# EAGLE board RM pulses (EAGLE 7.5.0)
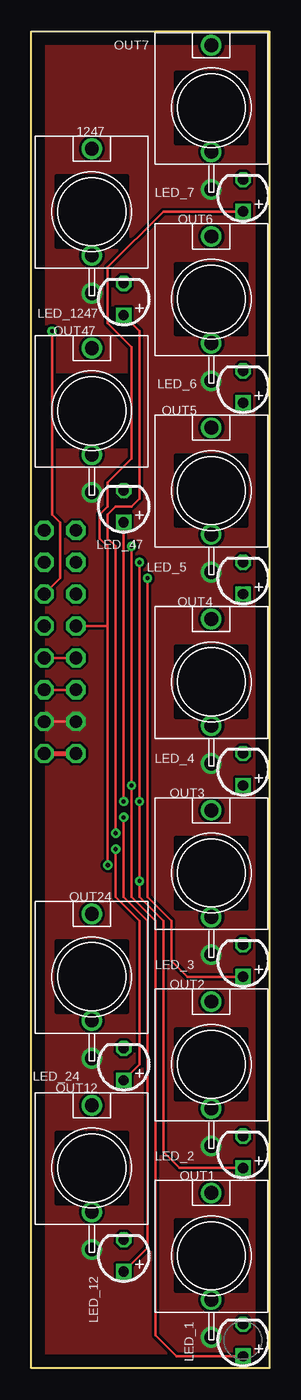
[diagram p0: board, top side]
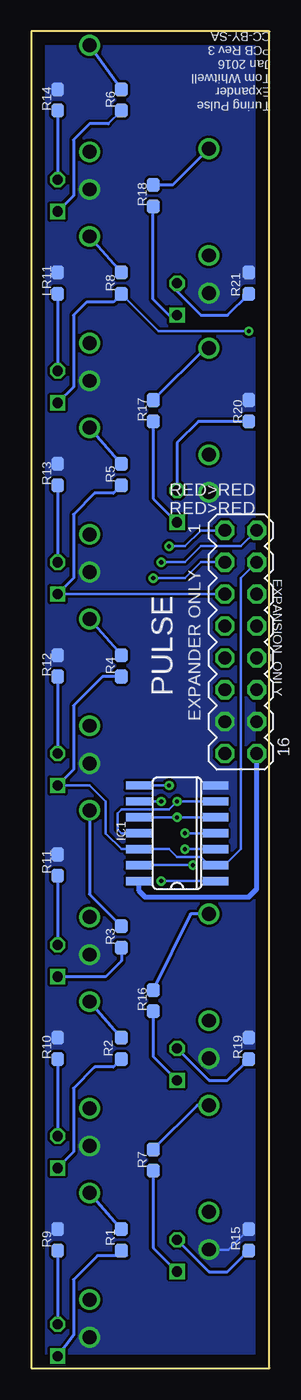
[diagram p1: board, bottom side, seen from below]

Size 18.99 x 106.49 mm. Coordinates in mm from the lower left corner, seen from the top.
Outline: 0,106.49 18.99,106.49 18.99,0 0,0 0,106.49
Copper layers (1*16): Top 0.035mm / dielectric 0.2mm / Bottom 0.018mm
Design rules "default *": minimum track width 10mil, minimum drill 0.61mm, track to track 8mil, track to pad 8mil, pad to pad 8mil, via to via 8mil, smd to smd 8mil, copper to edge 40mil, drill to drill 8mil, minimum pad ring 0mil, minimum via ring 8mil, stop-mask expansion 2mil, vias tented up to drill 13mil, thermal gap 10mil
Net classes: 0 default: width 0.203 mm, clearance 0.152 mm, clearance 0.152 mm to class 1, clearance 0.152 mm to class 2; 1 GND: width 0.203 mm, clearance 0.152 mm, clearance 0.152 mm to class 0, clearance 0.152 mm to class 2; 2 PWR: width 0.203 mm, clearance 0.152 mm, clearance 0.152 mm to class 0, clearance 0.152 mm to class 1

## Footprints (pad centres in the part's own frame; a part is rotated, then mirrored left to right if it is on the bottom)
WQP-PJ301M-12_JACK = drill 1.1 pad 1.65: P$1_TIP 0,5; P$2_SWITCH 0,-3.5; P$3_SLEEVE 0,-6.5
MA08-2 = drill 1.016 pad 1.524 octagon: 1 -8.89,-1.27; 2 -8.89,1.27; 3 -6.35,-1.27; 4 -6.35,1.27; 5 -3.81,-1.27; 6 -3.81,1.27; 7 -1.27,-1.27; 8 -1.27,1.27; 9 1.27,-1.27; 10 1.27,1.27; 11 3.81,-1.27; 12 3.81,1.27; 13 6.35,-1.27; 14 6.35,1.27; 15 8.89,-1.27; 16 8.89,1.27
SO14 = smd 0.66 x 2.032: 1 -3.81,-3.073; 2 -2.54,-3.073; 3 -1.27,-3.073; 4 0,-3.073; 5 1.27,-3.073; 6 2.54,-3.073; 7 3.81,-3.073; 8 3.81,3.073; 9 2.54,3.073; 10 1.27,3.073; 11 0,3.073; 12 -1.27,3.073; 13 -2.54,3.073; 14 -3.81,3.073
LED3MM = drill 0.813 pad 1.219 square: A -1.27,0 | drill 0.813 pad 1.219 octagon: K 1.27,0
LED3MM_LED_2 = drill 0.813 pad 1.219 square: A -1.27,0 | drill 0.813 pad 1.219 octagon: K 1.27,0
LED3MM_LED_4 = drill 0.813 pad 1.219 square: A -1.27,0 | drill 0.813 pad 1.219 octagon: K 1.27,0
LED3MM_LED_5 = drill 0.813 pad 1.219 square: A -1.27,0 | drill 0.813 pad 1.219 octagon: K 1.27,0
LED3MM_LED_6 = drill 0.813 pad 1.219 square: A -1.27,0 | drill 0.813 pad 1.219 octagon: K 1.27,0
LED3MM_LED_12 = drill 0.813 pad 1.219 square: A -1.27,0 | drill 0.813 pad 1.219 octagon: K 1.27,0
LED3MM_LED_24 = drill 0.813 pad 1.219 square: A -1.27,0 | drill 0.813 pad 1.219 octagon: K 1.27,0
LED3MM_LED_47 = drill 0.813 pad 1.219 square: A -1.27,0 | drill 0.813 pad 1.219 octagon: K 1.27,0
LED3MM_LED_1247 = drill 0.813 pad 1.219 square: A -1.27,0 | drill 0.813 pad 1.219 octagon: K 1.27,0
RES_0603 = smd 1.1 x 1: 1 -0.85,0; 2 0.85,0
WQP-PJ301M-12_JACK_OUT1 = drill 1.1 pad 1.65: P$1_TIP 0,5; P$2_SWITCH 0,-3.5; P$3_SLEEVE 0,-6.5
WQP-PJ301M-12_JACK_OUT2 = drill 1.1 pad 1.65: P$1_TIP 0,5; P$2_SWITCH 0,-3.5; P$3_SLEEVE 0,-6.5
WQP-PJ301M-12_JACK_OUT5 = drill 1.1 pad 1.65: P$1_TIP 0,5; P$2_SWITCH 0,-3.5; P$3_SLEEVE 0,-6.5
WQP-PJ301M-12_JACK_OUT7 = drill 1.1 pad 1.65: P$1_TIP 0,5; P$2_SWITCH 0,-3.5; P$3_SLEEVE 0,-6.5
RES_0603_R15 = smd 1.1 x 1: 1 -0.85,0; 2 0.85,0

## Placement (x,y rotation side)
1247  THONKICONNNEW  [WQP-PJ301M-12_JACK]  4.83,92.14 0 top
EXPANSION_ONLY  MA08-2  [MA08-2]  2.29,57.85 270 bottom
IC1  4081  [SO14]  7.37,42.61 90 bottom
LED_1  LED3MM  [LED3MM]  16.89,2.23 90 top
LED_2  LED3MM  [LED3MM_LED_2]  16.89,17.21 90 top
LED_3  LED3MM  [LED3MM_LED_2]  16.89,32.45 90 top
LED_4  LED3MM  [LED3MM_LED_4]  16.89,47.69 90 top
LED_5  LED3MM  [LED3MM_LED_5]  16.89,62.93 90 top
LED_6  LED_6  [LED3MM_LED_6]  16.89,78.17 90 top
LED_7  LED3MM  [LED3MM_LED_6]  16.89,93.41 90 top
LED_12  LED3MM  [LED3MM_LED_12]  7.37,8.96 90 top
LED_24  LED3MM  [LED3MM_LED_24]  7.37,24.2 90 top
LED_47  LED3MM  [LED3MM_LED_47]  7.37,68.65 90 top
LED_1247  LED3MM  [LED3MM_LED_1247]  7.37,85.16 90 top
LR11  2k  [RES_0603]  16.89,86.43 90 bottom
OUT1  THONKICONNNEW  [WQP-PJ301M-12_JACK_OUT1]  14.35,8.96 0 top
OUT2  THONKICONNNEW  [WQP-PJ301M-12_JACK_OUT2]  14.35,24.2 0 top
OUT3  THONKICONNNEW  [WQP-PJ301M-12_JACK_OUT2]  14.35,39.44 0 top
OUT4  THONKICONNNEW  [WQP-PJ301M-12_JACK_OUT1]  14.35,54.68 0 top
OUT5  THONKICONNNEW  [WQP-PJ301M-12_JACK_OUT5]  14.35,69.92 0 top
OUT6  THONKICONNNEW  [WQP-PJ301M-12_JACK_OUT1]  14.35,85.16 0 top
OUT7  THONKICONNNEW  [WQP-PJ301M-12_JACK_OUT7]  14.35,100.4 0 top
OUT12  THONKICONNNEW  [WQP-PJ301M-12_JACK_OUT1]  4.83,15.94 0 top
OUT24  THONKICONNNEW  [WQP-PJ301M-12_JACK]  4.83,31.18 0 top
OUT47  THONKICONNNEW  [WQP-PJ301M-12_JACK_OUT1]  4.83,76.27 0 top
R1  1k  [RES_0603]  11.81,10.23 90 bottom
R2  1k  [RES_0603_R15]  11.81,25.47 270 bottom
R3  1k  [RES_0603]  11.81,34.36 90 bottom
R4  1k  [RES_0603]  11.81,55.95 90 bottom
R5  1k  [RES_0603]  11.81,71.19 90 bottom
R6  1k  [RES_0603]  11.81,101.03 90 bottom
R7  1k  [RES_0603]  9.27,16.58 90 bottom
R8  1k  [RES_0603]  11.81,86.43 90 bottom
R9  2k  [RES_0603]  16.89,10.23 90 bottom
R10  2k  [RES_0603]  16.89,25.47 90 bottom
R11  2k  [RES_0603]  16.89,40.07 90 bottom
R12  2k  [RES_0603]  16.89,55.95 90 bottom
R13  2k  [RES_0603]  16.89,71.19 90 bottom
R14  2k  [RES_0603]  16.89,101.03 90 bottom
R15  2k  [RES_0603_R15]  1.65,10.23 270 bottom
R16  1k  [RES_0603]  9.27,29.28 90 bottom
R17  1k  [RES_0603]  9.27,76.27 90 bottom
R18  1k  [RES_0603]  9.27,93.41 90 bottom
R19  2k  [RES_0603_R15]  1.65,25.47 270 bottom
R20  2k  [RES_0603]  1.65,76.27 90 bottom
R21  2k  [RES_0603_R15]  1.65,86.43 270 bottom

## Library data of the parts
1247 IC1 LED_1-LED_7 LED_12 LED_24 LED_47 LED_1247 OUT1-OUT7 OUT12 OUT24 OUT47 = common
EXPANSION_ONLY = common; OC_FARNELL: unknown; OC_NEWARK: unknown
LR11 R1-R21 = common; UNIQUE_NAME: RES_0603

## Nets
+12V [PWR]: EXPANSION_ONLY.15 EXPANSION_ONLY.16 IC1.14
-12V [PWR]: EXPANSION_ONLY.11 EXPANSION_ONLY.12
BIT1: EXPANSION_ONLY.1 IC1.8 LED_1.A R1.1
BIT2: EXPANSION_ONLY.2 IC1.1 IC1.9 LED_2.A R2.2
BIT3: EXPANSION_ONLY.3 LED_3.A R3.1
BIT4: EXPANSION_ONLY.4 IC1.2 IC1.12 LED_4.A R4.1
BIT5: EXPANSION_ONLY.5 LED_5.A R5.1
BIT6: EXPANSION_ONLY.6 LED_6.A R8.1
BIT7: EXPANSION_ONLY.7 IC1.13 LED_7.A R6.1
BIT9: IC1.5 IC1.10 LED_12.A R7.1
BIT10: IC1.3 LED_24.A R16.1
BIT11: IC1.4 LED_1247.A R18.1
BIT12: IC1.6 IC1.11 LED_47.A R17.1
CLOCK: EXPANSION_ONLY.9 EXPANSION_ONLY.10
GND [GND]: 1247.P$3_SLEEVE EXPANSION_ONLY.13 EXPANSION_ONLY.14 IC1.7 LR11.2 OUT1.P$3_SLEEVE OUT2.P$3_SLEEVE OUT3.P$3_SLEEVE OUT4.P$3_SLEEVE OUT5.P$3_SLEEVE OUT6.P$3_SLEEVE OUT7.P$3_SLEEVE OUT12.P$3_SLEEVE OUT24.P$3_SLEEVE OUT47.P$3_SLEEVE R9.2 R10.2 R11.2 R12.2 R13.2 R14.2 R15.1 R19.1 R20.2 R21.1
N$1: OUT1.P$1_TIP R1.2
N$2: LED_1.K R9.1
N$3: OUT12.P$1_TIP R7.2
N$4: OUT2.P$1_TIP R2.1
N$5: LED_2.K R10.1
N$6: LED_12.K R15.2
N$7: OUT4.P$1_TIP R4.2
N$8: LED_4.K R12.1
N$9: OUT24.P$1_TIP R16.2
N$10: OUT7.P$1_TIP R6.2
N$11: LED_7.K R14.1
N$12: LED_24.K R19.2
N$13: 1247.P$1_TIP R18.2
N$14: LED_1247.K R21.2
N$15: OUT3.P$1_TIP R3.2
N$16: OUT47.P$1_TIP R17.2
N$17: LED_47.K R20.1
N$18: LED_3.K R11.1
N$19: OUT5.P$1_TIP R5.2
N$20: LED_5.K R13.1
N$21: OUT6.P$1_TIP R8.2
N$22: LED_6.K LR11.1

## Tracks (layer width: path | path; a pad name or v marks a point on that pad's centre or on a via)
+12V
  Top 0.406: EXPANSION_ONLY.16 EXPANSION_ONLY.15 | EXPANSION_ONLY.15
  Bottom 0.406: IC1.14 10.44,38.06 9.91,37.53 1.65,37.53 1.02,38.17 EXPANSION_ONLY.16
-12V
  Top 0.203: EXPANSION_ONLY.12 EXPANSION_ONLY.11 | EXPANSION_ONLY.11
BIT1  (via drill 0.33 pad 0.64)
  Top 0.203: LED_1.A 11.56,0.95 9.91,2.61 9.91,35.63 8,37.53 v8,46.42 v8,65.47 | v8,65.47
  Bottom 0.203: IC1.8 v8,46.42 | v8,46.42 | EXPANSION_ONLY.1 5.46,66.74 6.73,65.47 v8,65.47
  Bottom 0.254: R1.1 11.39,8.96 13.72,8.96 15.62,7.05 15.62,2.61 LED_1.A
BIT2  (via drill 0.33 pad 0.64)
  Top 0.203: LED_2.A 11.81,15.94 10.54,17.21 10.54,35.63 8.64,37.53 v8.64,38.8 v8.64,45.15 | v8.64,45.15 v8.64,64.2 | v8.64,64.2 | v8.64,45.15
  Bottom 0.203: IC1.1 v8.64,38.8 | v8.64,38.8 | IC1.9 v8.64,45.15 | v8.64,45.15 | EXPANSION_ONLY.2 2.29,65.47 5.46,65.47 6.73,64.2 v8.64,64.2
  Bottom 0.254: R2.2 12.45,23.98 13.93,23.98 15.62,22.29 15.62,17.21 LED_2.A
BIT3  (via drill 0.33 pad 0.64)
  Top 0.203: LED_3.A 12.45,31.18 11.18,32.45 11.18,35.63 9.27,37.53 v9.27,62.93
  Bottom 0.203: v9.27,62.93 6.73,62.93 5.46,64.2 EXPANSION_ONLY.3
  Bottom 0.254: R3.1 11.81,32.45 13.08,31.18 LED_3.A
BIT4
  Bottom 0.203: EXPANSION_ONLY.4 2.29,62.93 2.29,41.34 3.56,40.07 IC1.2 4.83,40.07 5.46,40.71 7.37,40.71 8,41.34 IC1.12 11.81,41.34 13.08,42.61 13.08,45.15 14.35,46.42 LED_4.A
  Bottom 0.254: R4.1 13.3,55.1 15.62,52.77 15.62,47.69 LED_4.A
BIT5
  Bottom 0.203: LED_5.A EXPANSION_ONLY.5 | EXPANSION_ONLY.5
  Bottom 0.254: R5.1 12.45,69.7 13.93,69.7 15.62,68.01 15.62,62.93 LED_5.A
BIT6  (via drill 0.33 pad 0.64)
  Top 0.203: EXPANSION_ONLY.6 2.29,62.93 2.29,67.38 1.65,68.01 v1.65,82.62
  Bottom 0.203: v1.65,82.62 8.85,82.62 R8.1
  Bottom 0.254: R8.1 12.45,84.94 14.57,84.94 15.62,83.89 15.62,78.17 LED_6.A
BIT7  (via drill 0.33 pad 0.64)
  Top 0.203: EXPANSION_ONLY.7 6.1,59.12 | 6.1,59.12 v6.1,40.07 | LED_7.A 10.54,92.14 6.1,87.7 6.1,83.25 8,81.35 8,72.46 6.1,70.55 6.1,68.65 5.46,68.01 5.46,66.11 6.1,65.47 6.1,59.12
  Bottom 0.203: IC1.13 v6.1,40.07 | v6.1,40.07 | R6.1 12.87,99.13
  Bottom 0.254: 12.87,99.13 14.35,99.13 15.62,97.86 15.62,93.41 LED_7.A
BIT9  (via drill 0.33 pad 0.64)
  Top 0.203: LED_12.A 9.27,9.59 9.27,35.63 7.37,37.53 v7.37,43.88
  Bottom 0.203: IC1.10 v7.37,43.88 | v7.37,43.88 | v7.37,43.88 IC1.5 | IC1.5
  Bottom 0.254: R7.1 9.27,9.59 LED_12.A
BIT10  (via drill 0.33 pad 0.64)
  Top 0.203: LED_24.A 8.64,24.2 8.64,35.63 6.73,37.53 v6.73,41.34
  Bottom 0.203: IC1.3 v6.73,41.34 | v6.73,41.34
  Bottom 0.254: R16.1 9.27,24.83 LED_24.A
BIT11  (via drill 0.33 pad 0.64)
  Top 0.203: v6.73,42.61 6.73,65.47 6.1,66.11 6.1,68.01 6.73,68.65 8,68.65 8.64,69.28 8.64,82.62 LED_1247.A
  Bottom 0.203: IC1.4 v6.73,42.61 | v6.73,42.61
  Bottom 0.254: LED_1247.A 8,83.89 9.27,85.16 R18.1
BIT12  (via drill 0.33 pad 0.64)
  Top 0.203: LED_47.A v7.37,45.15 | v7.37,45.15
  Bottom 0.203: IC1.6 v7.37,45.15 | v7.37,45.15 | v7.37,45.15 8,44.52 11.81,44.52 12.13,44.2 12.13,42.93 11.81,42.61 IC1.11
  Bottom 0.254: R17.1 9.27,69.28 LED_47.A
CLOCK
  Top 0.203: EXPANSION_ONLY.10 EXPANSION_ONLY.9 | EXPANSION_ONLY.9
GND
  Top 0.203: EXPANSION_ONLY.14 EXPANSION_ONLY.13 | EXPANSION_ONLY.13
  Bottom 0.203: OUT12.P$3_SLEEVE 3.29,9.44 R15.1
  pour Bottom (isolate 0.178): 0.36,106.14 18.64,106.14 18.64,0.36 0.36,0.36
  pour Top (isolate 0.178): 0.36,106.14 18.64,106.14 18.64,0.36 0.36,0.36
N$1
  Bottom 0.254: OUT1.P$1_TIP R1.2 | R1.2
N$2
  Bottom 0.254: R9.1 LED_1.K | LED_1.K
N$3
  Bottom 0.254: OUT12.P$1_TIP 5.76,20.94 R7.2
N$4
  Bottom 0.254: OUT2.P$1_TIP R2.1 | R2.1
N$5
  Bottom 0.254: R10.1 LED_2.K | LED_2.K
N$6
  Bottom 0.254: LED_12.K 4.83,7.69 3.34,7.69 R15.2
N$7
  Bottom 0.254: OUT4.P$1_TIP R4.2 | R4.2
N$8
  Bottom 0.254: R12.1 LED_4.K | LED_4.K
N$9
  Bottom 0.254: OUT24.P$1_TIP 6.31,36.18 R16.2
N$10
  Bottom 0.254: OUT7.P$1_TIP R6.2 | R6.2
N$11
  Bottom 0.254: R14.1 LED_7.K | LED_7.K
N$12
  Bottom 0.254: LED_24.K 4.83,22.93 3.34,22.93 R19.2
N$13
  Bottom 0.254: R18.2 7.71,94.26 1247.P$1_TIP
N$14
  Bottom 0.254: LED_1247.K 7.37,85.79 5.46,83.89 3.34,83.89 R21.2
N$15
  Bottom 0.254: OUT3.P$1_TIP 14.35,37.75 R3.2
N$16
  Bottom 0.254: OUT47.P$1_TIP 5.12,81.27 R17.2
N$17
  Bottom 0.254: R20.1 5.68,75.42 7.37,73.73 LED_47.K
N$18
  Bottom 0.254: R11.1 LED_3.K | LED_3.K
N$19
  Bottom 0.254: OUT5.P$1_TIP R5.2 | R5.2
N$20
  Bottom 0.254: R13.1 LED_5.K | LED_5.K
N$21
  Bottom 0.254: OUT6.P$1_TIP R8.2 | R8.2
N$22
  Bottom 0.254: LR11.1 LED_6.K | LED_6.K

## Text on the board
tPlace: OUT7 | 1247 | LED_7 | OUT6 | LED_1247 | OUT47 | LED_6 | OUT5 | LED_47 | LED_5 | OUT4 | LED_4 | OUT3 | OUT24 | LED_3 | OUT2 | LED_24 | OUT12 | LED_2 | OUT1 | LED_12 | LED_1
bPlace: Turing Pulse / Expander / Tom Whitwell / Jan 2016 / PCB Rev 3 / CC-BY-SA | R6 | R14 | R18 | R8 | R21 | LR11 | R20 | R17 | R5 | R13 | RED>RED / RED>RED | EXPANSION_ONLY | EXPANDER ONLY | PULSE | R4 | R12 | IC1 | R11 | R3 | R16 | R19 | R2 | R10 | R7 | R1 | R9 | R15
tDocu: OUT7 | 1247 | LED_7 | OUT6 | LED_1247 | OUT47 | LED_6 | OUT5 | LED_47 | LED_5 | OUT4 | LED_4 | OUT3 | OUT24 | LED_3 | OUT2 | LED_24 | OUT12 | LED_2 | OUT1 | LED_12 | LED_1
bDocu: R6 | R14 | R18 | R8 | R21 | LR11 | R20 | R17 | R5 | R13 | EXPANSION_ONLY | R4 | R12 | IC1 | R11 | R3 | R16 | R19 | R2 | R10 | R7 | R1 | R9 | R15